# Altium PCB BOARD_RESOURCES.PcbDoc
Units mm, origin at the board's own origin, x right, y up, seen from the top; angles counter-clockwise.
Board outline 50 x 50 mm, 2 copper layers (Top Layer, Bottom Layer); 8 components, 6 nets, 48 pads, 0 vias.
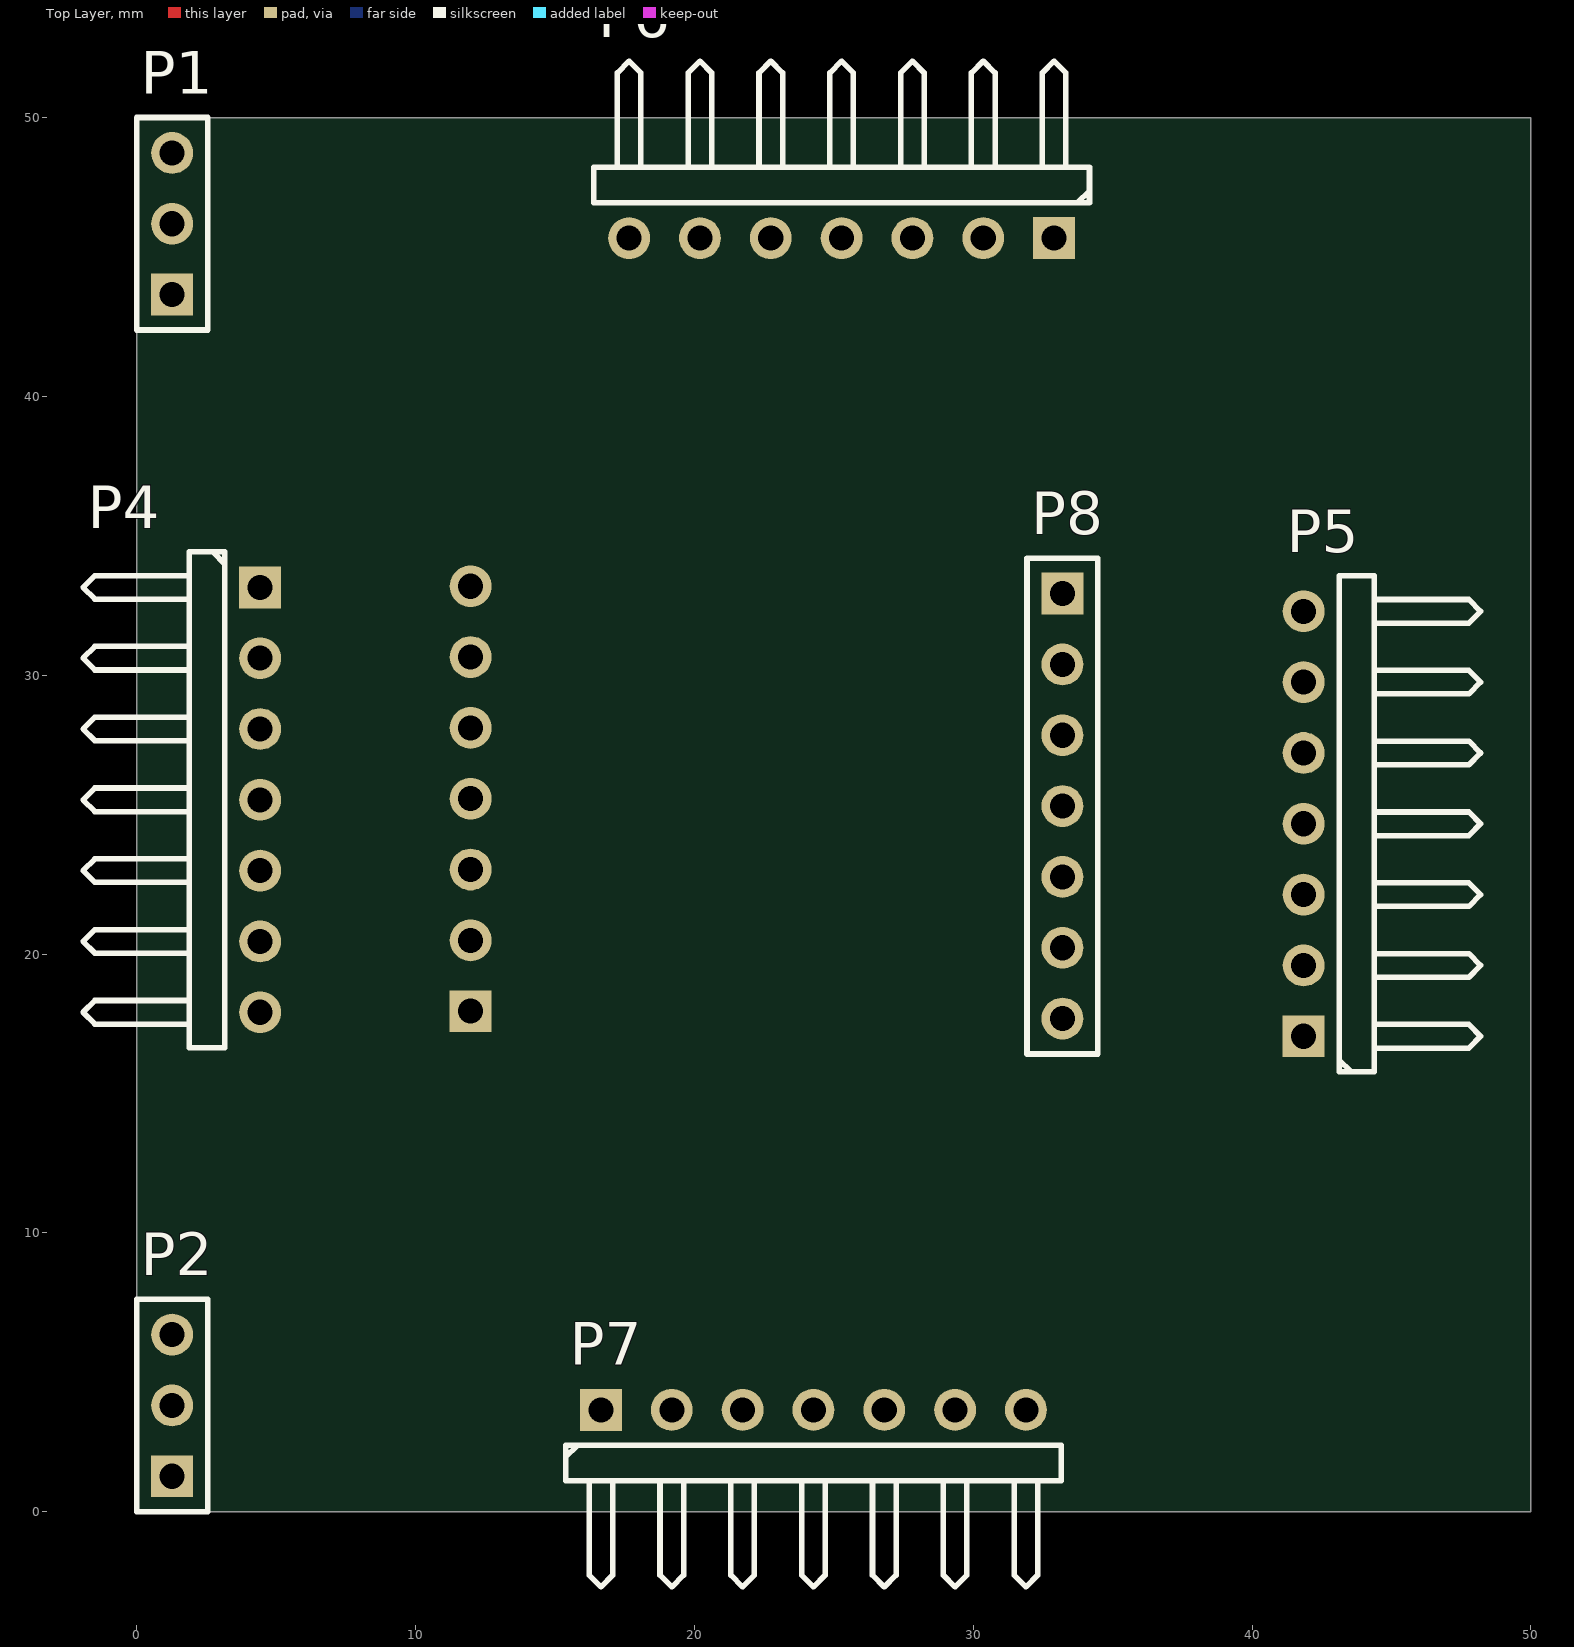
[diagram p0: Top Layer view]
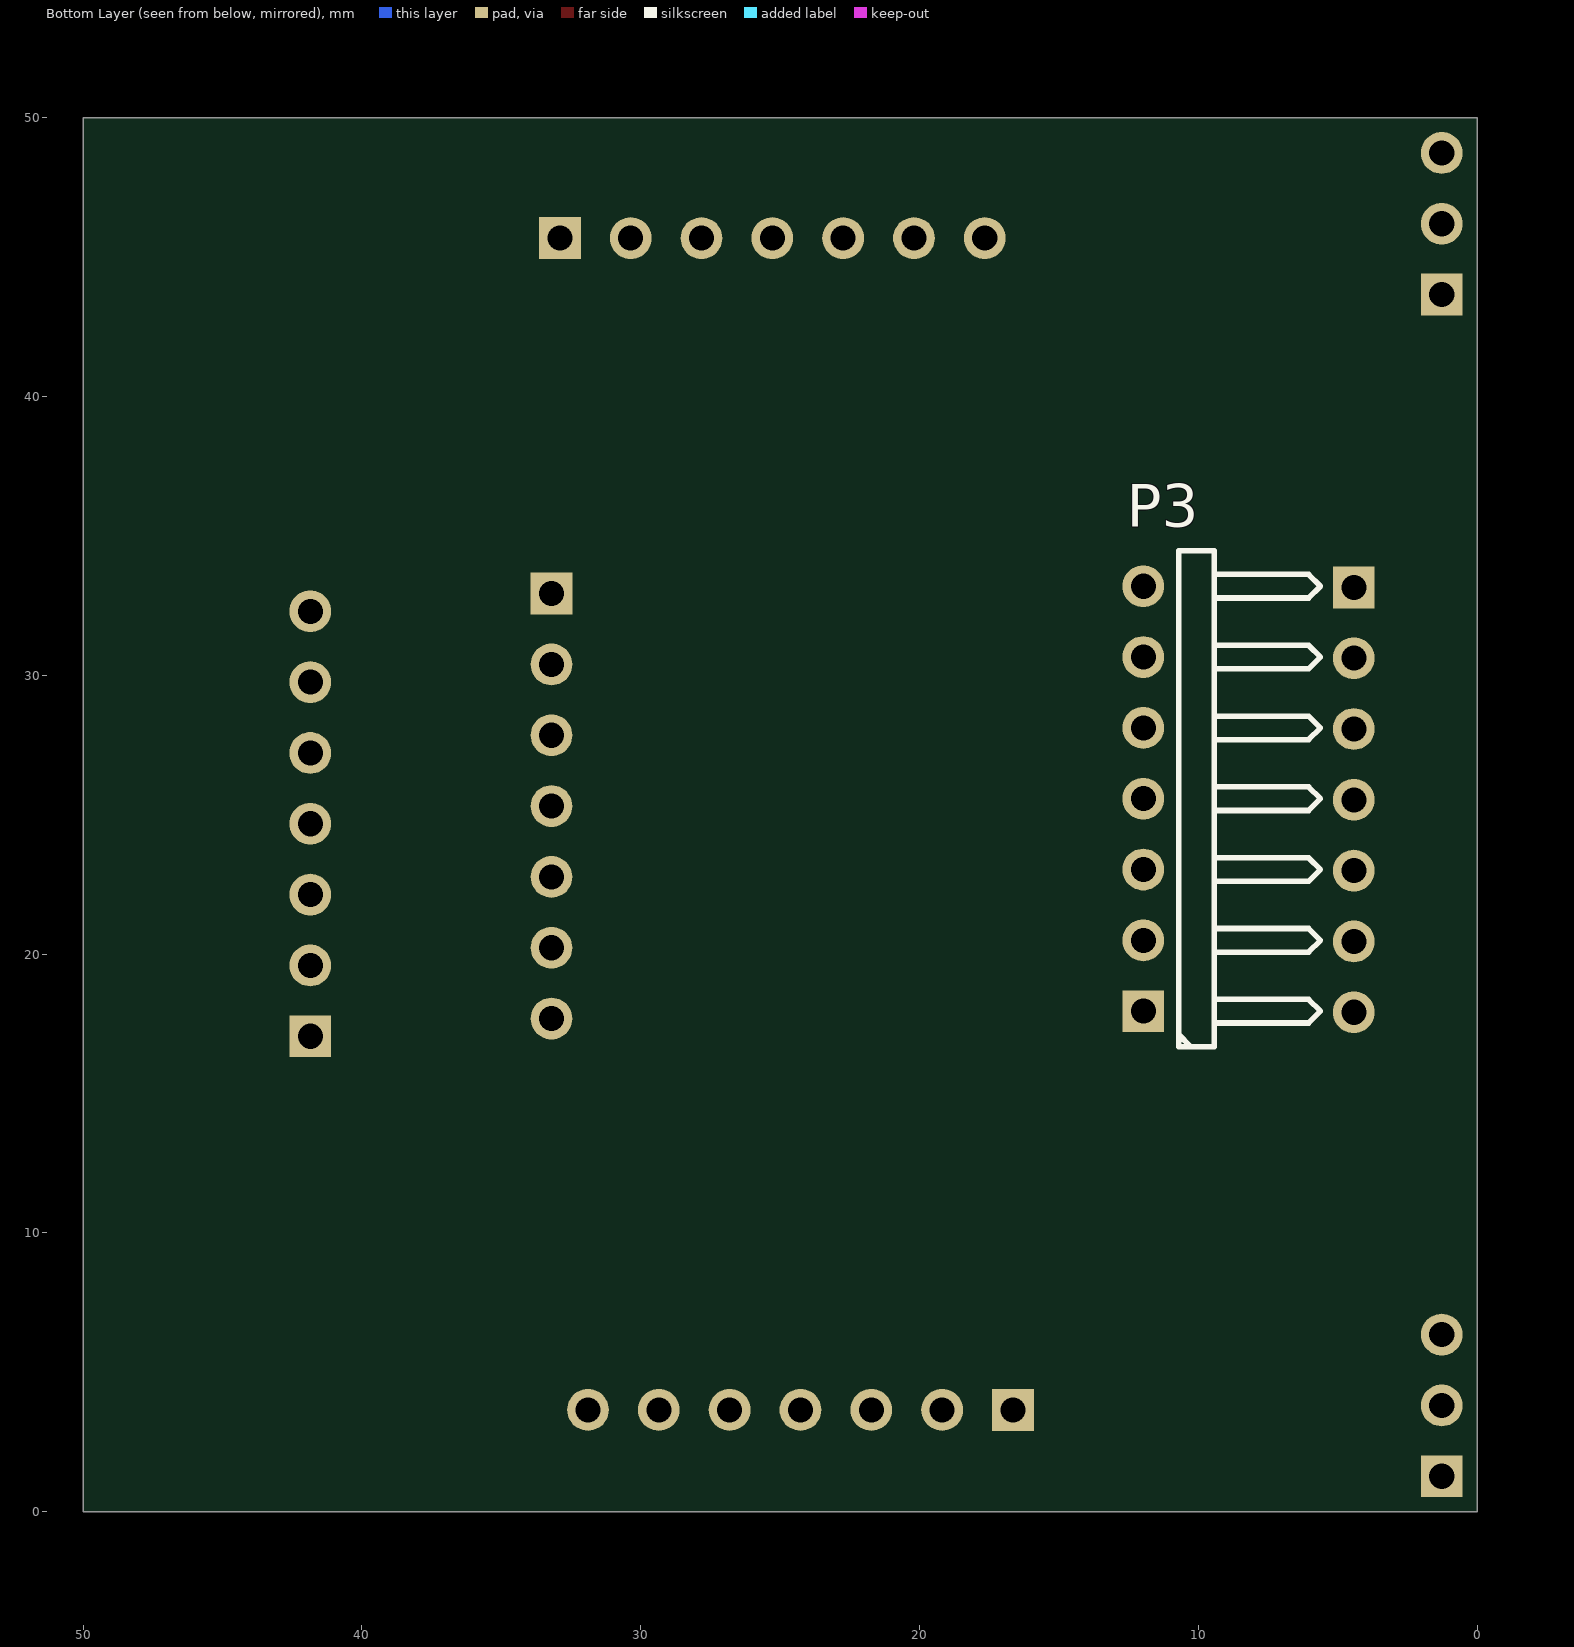
[diagram p1: Bottom Layer view, seen from below]

## Layer stack, top to bottom
Top Solder: solder mask 0.0102, Solder Resist, Dk 3.5
Top Layer: signal copper 0.0356
Dielectric 1: dielectric 0.32, FR-4, Dk 4.8
Bottom Layer: signal copper 0.0356
Bottom Solder: solder mask 0.0102, Solder Resist, Dk 3.5

## Board outline
0,0 50,0 50,50 0,50

## Design rules (kind name [scope] priority, off if disabled: settings)
Clearance [All] p1: gap=0.254
PolygonConnect [All] p1: connectstyle=Relief reliefconductorwidth=0.254 reliefentries=4 polygonreliefangle="90 Angle" airgapwidth=0.254
RoutingVias [All] p1: holewidth=0.711 width=1.27 viastyle="Through Hole" minholewidth=0.711 minwidth=1.27 maxholewidth=0.711 maxwidth=1.27
SolderMaskExpansion [All] p1: expansion=0.102
Width [All] p1: maxlimit=0.254 minlimit=0.254 preferedwidth=0.254
29 further rules are at their usual default settings.

## Components (designator, comment, footprint, x,y, rotation, side; value= is the part's Value field where it differs from the comment)
P1 "Header 3" HDR1X3 1.27,43.65 r90 top
P2 "Header 3" HDR1X3 1.27,1.27 r90 top
P3 "Header 7H" HDR1X7H 11.975,17.95 r90 bottom
P4 "Header 7H" HDR1X7H 4.425,33.15 r270 top
P5 "Header 7H" HDR1X7H 41.85,17.05 r90 top
P6 "Header 7H" HDR1X7H 32.9,45.675 r180 top
P7 "Header 7H" HDR1X7H 16.65,3.65 r0 top
P8 "Header 7" HDR1X7 33.2,32.925 r270 top

## Footprints (in the part's own frame and the unit in brackets; to place one, negate y for a bottom-side part, rotate by r counter-clockwise, add the part's x,y. Pads: shape width x height; smd on the part's side, far side on the other; paste and mask are expansions set on the pad)
HDR1X3 [mm] "Connector; Header; 3 Position"
  rect 1.5x1.5 hole 0.9: 1(0,0)
  round 1.5 hole 0.9: 2(2.54,0) 3(5.08,0)
  silkscreen extent -1.27,-1.27 6.35,1.27
HDR1X7 [mm] "Connector; Header; 7 Position"
  rect 1.5x1.5 hole 0.9: 1(0,0)
  round 1.5 hole 0.9: 2(2.54,0) 3(5.08,0) 4(7.62,0) 5(10.16,0) 6(12.7,0) 7(15.24,0)
  silkscreen extent -1.27,-1.27 16.51,1.27
HDR1X7H [mm] "Connector; Header; 7 Position; Right Angle"
  rect 1.5x1.5 hole 0.9: 1(0,0)
  round 1.5 hole 0.9: 2(2.54,0) 3(5.08,0) 4(7.62,0) 5(10.16,0) 6(12.7,0) 7(15.24,0)
  silkscreen extent -1.27,-6.35 16.51,-1.27

## Part data
P1 P2: "Header, 3-Pin"
P3 P4 P5 P6 P7: "Header, 7-Pin, Right Angle"
P8: "Header, 7-Pin"

## Nets (pads, with @x,y where several pads share a name; then routed paths per layer and width w, separated by ;. In a path a pad name is that pad's centre, name@x,y a point inside that pad or via, vN(x,y) a via of type N, cw(c..) or ccw(c..) an arc to the next point about the centre after c; other vN are vias at no path point)
DATA: P1.2
EN: P2.2
GND: P2.1
LT: P2.3
SS: P1.1
VCC: P1.3
pads on no net: P3.1 P3.2 P3.3 P3.4 P3.5 P3.6 P3.7 P4.1 P4.2 P4.3 P4.4 P4.5 P4.6 P4.7 P5.1 P5.2 P5.3 P5.4 P5.5 P5.6 P5.7 P6.1 P6.2 P6.3 P6.4 P6.5 P6.6 P6.7 P7.1 P7.2 P7.3 P7.4 P7.5 P7.6 P7.7 P8.1 P8.2 P8.3 P8.4 P8.5 P8.6 P8.7

## Silkscreen, mask and mechanical layers (free items; w line width, h text height)
Mechanical 15:
  the board outline again, w0.254